# Altium PCB CORE_V2_封装(AD格式).PcbDoc
Units mil, origin at the board's own origin, x right, y up, seen from the top; angles counter-clockwise.
Board outline 2165.4 x 2165.4 mil, 4 copper layers (Signal, Plane, Signal #001, Signal #002), stack 28.8 mil thick; 9 components, 0 nets, 187 pads, 0 vias.
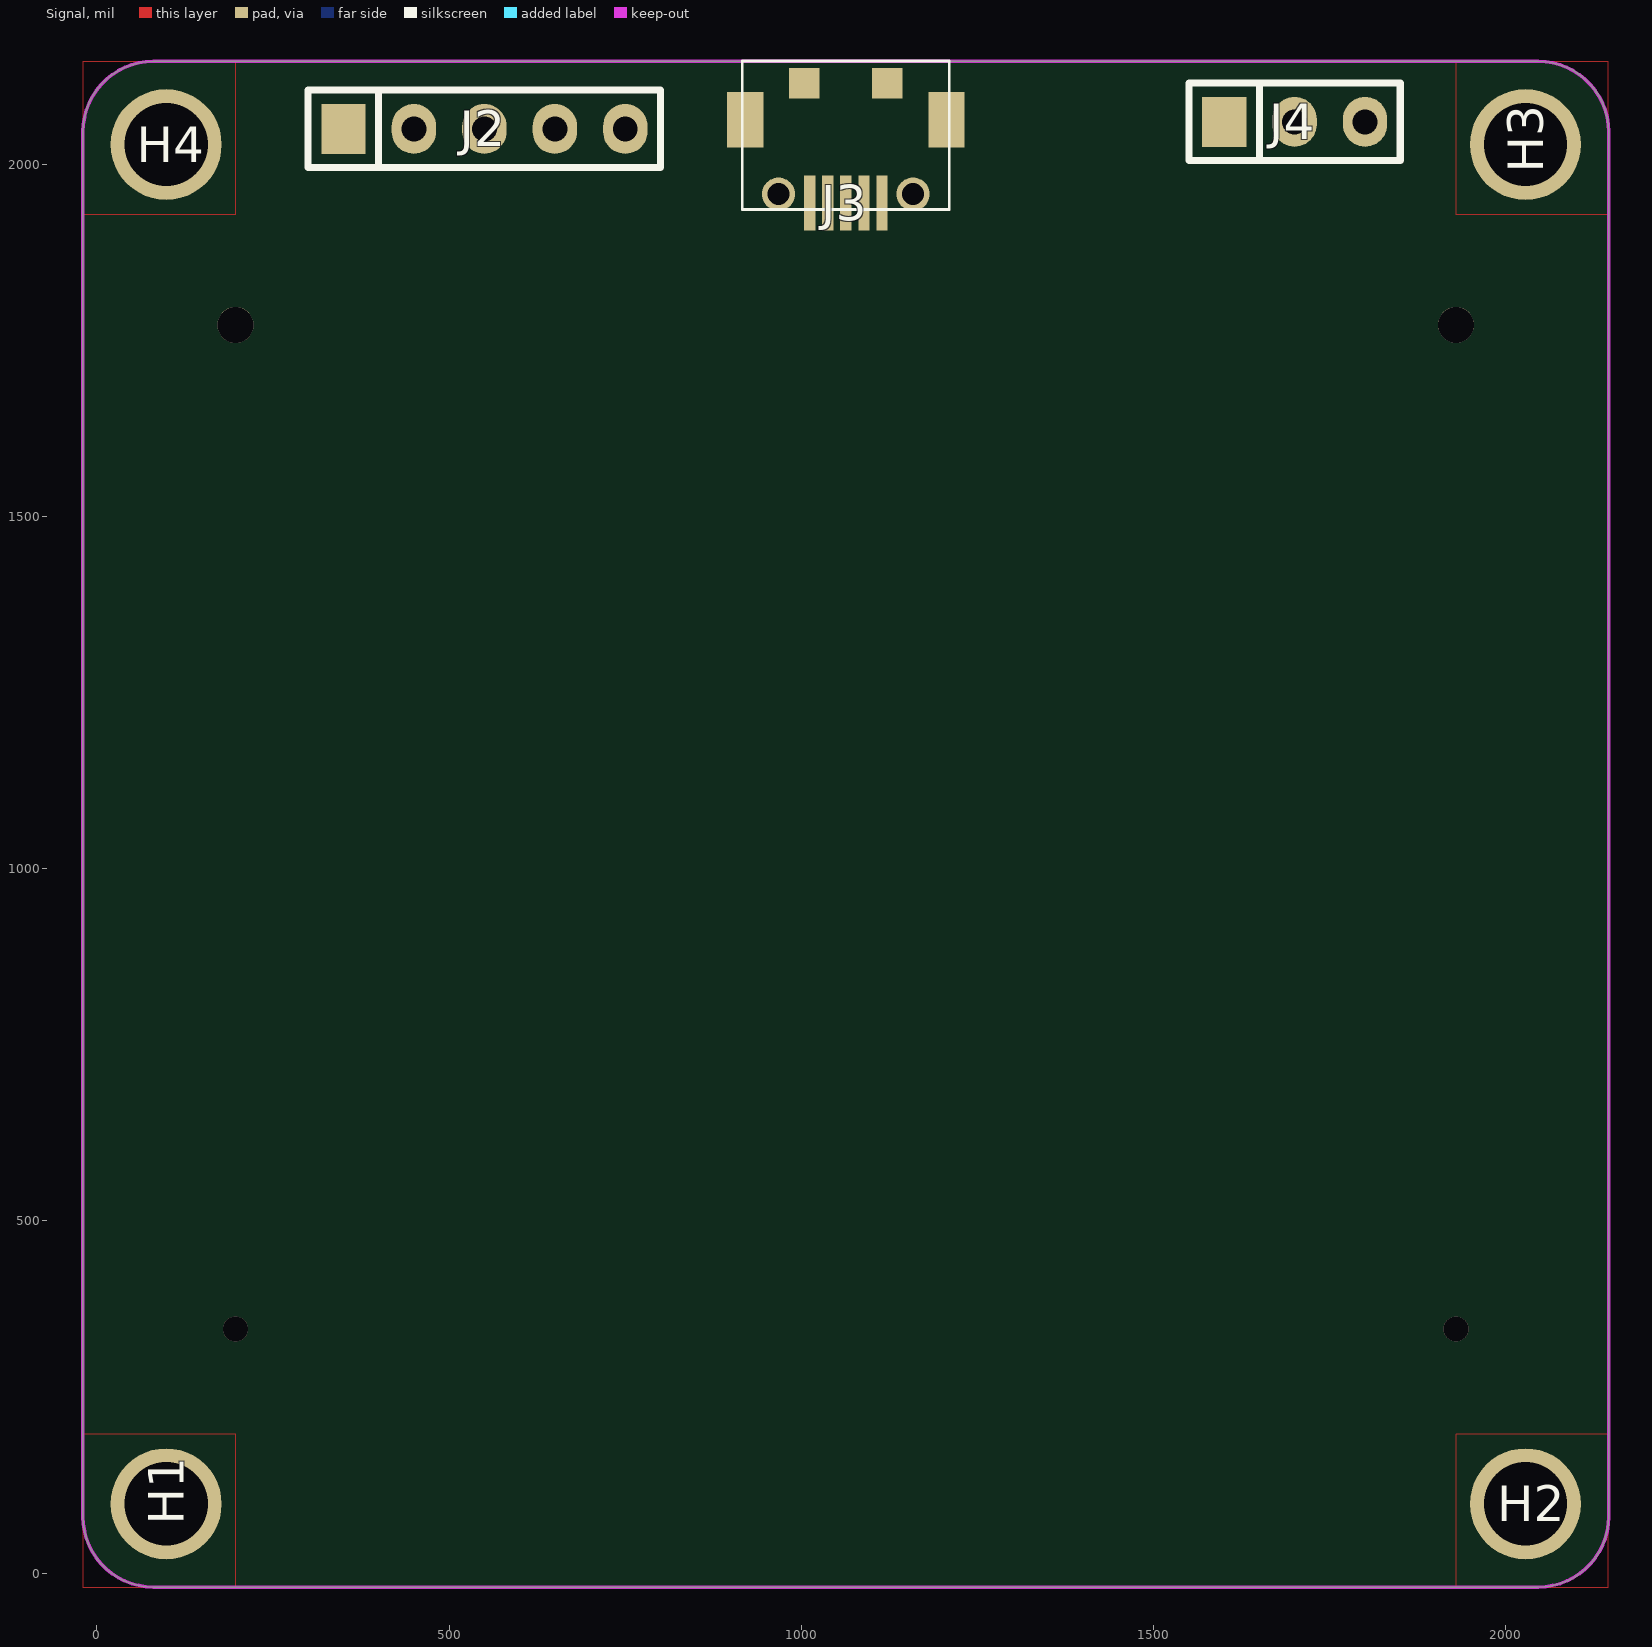
[diagram p0: Signal view]
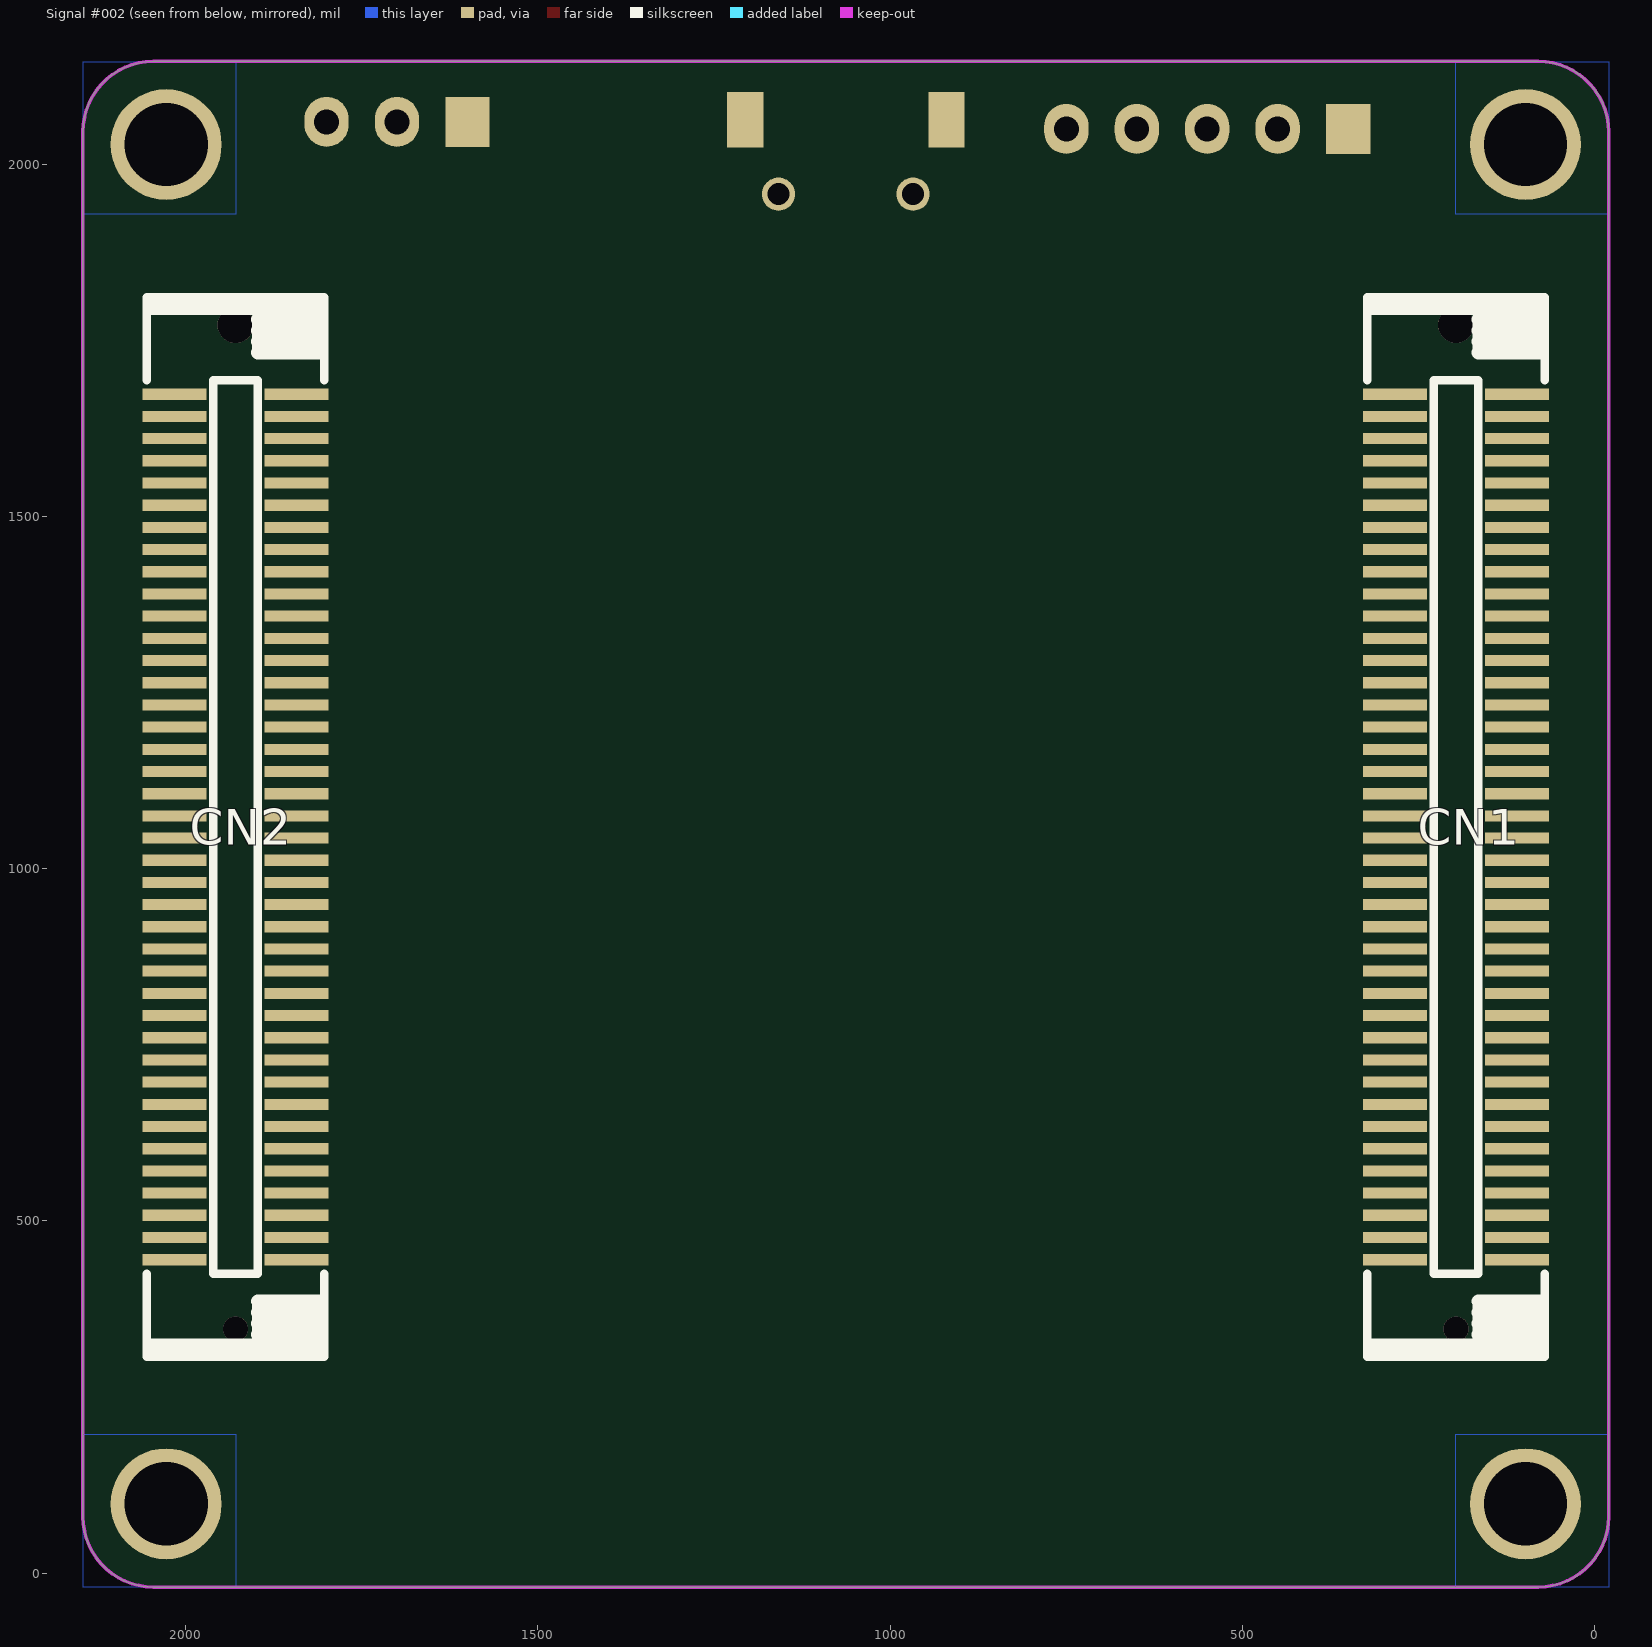
[diagram p1: Signal #002 view, seen from below]

## Layer stack, top to bottom
Solder Mask Top: solder mask 0.4, Solder Resist, Dk 3.5
Signal: signal copper 1.2
Dielectric 1: dielectric 8, FR-4, Dk 4.5
Plane: signal copper 1.2
Dielectric2: dielectric 8, FR-4, Dk 4.5
Signal #001: signal copper 1.2
Dielectric3: dielectric 8, FR-4, Dk 4.5
Signal #002: signal copper 1.2
Solder Mask Bottom: solder mask 0.4, Solder Resist, Dk 3.5

## Board outline
80,-19.7 2046,-19.7 ccw(c2046,80) 2145.7,80 2145.7,2046 ccw(c2046,2046) 2046,2145.7 80,2145.7 ccw(c80,2046) -19.7,2046 -19.7,80 ccw(c80,80)

## Design rules (kind name [scope] priority, off if disabled: settings)
Clearance "Clearance - Default - DEFAULT - Via" [IsVia vs IsVia] p1: gap=5 ignorepadtopadclearanceinfootprint=FALSE
Clearance "Clearance - Default - DEFAULT- SMD" [IsVia vs IsSMTPin] p2: gap=5 ignorepadtopadclearanceinfootprint=FALSE
Clearance "Clearance - Default - DEFAULT - Net" [All] p3: gap=5 ignorepadtopadclearanceinfootprint=FALSE except(0: Arc-Hole Track-Hole SMDPad-Hole THPad-Hole Via-Hole Fill-Hole Poly-Hole Region-Hole Text-Hole; 3.9: Via-Fill Via-Poly Via-Region; 5.2: Arc-Via Track-Via SMDPad-Via Via-Text; 6: Arc-THPad Track-THPad SMDPad-THPad THPad-Text; 10: Arc-Fill Arc-Poly Arc-Region Track-Fill Track-Poly Track-Region Text-Text)
ComponentClearance "ComponentClearance - Default -" [All] p1: gap=0 collisioncheckmode=3 verticalgap=10 showdistances=FALSE
ComponentClearance "ComponentClearance - Default - DEFAULT" [All] p2: gap=0 collisioncheckmode=3 verticalgap=10 showdistances=FALSE
FanoutControl Fanout_SOIC [IsSOIC] p1: bgadir=Out bgaviamode=Centered fanoutstyle=Auto fanoutdirection=Alternating viagrid=1 // Fanout_SOIC (Default Rule)
FanoutControl Fanout_Small [(CompPinCount < 5)] p2: bgadir=Out bgaviamode=Centered fanoutstyle=Auto fanoutdirection=OutThenIn viagrid=1 // Fanout_Small (Default Rule)
FanoutControl Fanout_BGA [IsBGA] p3: bgadir=Out bgaviamode=Centered fanoutstyle=Auto fanoutdirection=Alternating viagrid=1 // Fanout_BGA (Default Rule)
FanoutControl Fanout_LCC [IsLCC] p4: bgadir=Out bgaviamode=Centered fanoutstyle=Auto fanoutdirection=Alternating viagrid=1 // Fanout_LCC (Default Rule)
HoleToHoleClearance "HoleToHoleClearance - Default - DEFAULT" [All] p1: gap=0 allowstackedmicrovias=TRUE
Length "Default Length" [All] p1: maxlimit=50000 minlimit=0
MaxMinImpedance "Default Impedance" [All] p1: minimum=50.00 maximum=150.0
ParallelSegment "Default Parallel Segment Same Layer" [All] p1: limit=1000 gap=200
ParallelSegment "Default Parallel Segment Adjasent" [All] p2: limit=1000 gap=200
PlaneClearance "PlaneClearance - FootPrint 'MICRO_USB_5S'" [HasFootprint('MICRO_USB_5S')] p1: clearance=17.7 // PAD - Power Plane Clearance
PlaneClearance "PlaneClearance - FootPrint 'B2BF-2X40-0P8'" [HasFootprint('B2BF-2X40-0P8')] p2: clearance=9.85 // PAD - Power Plane Clearance
PlaneClearance "PlaneClearance - FootPrint 'SIP3-2P54'" [HasFootprint('SIP3-2P54')] p3: clearance=39.35 // PAD - Power Plane Clearance
PlaneClearance "PlaneClearance - FootPrint 'T3'" [HasFootprint('T3')] p4: clearance=39.35 // PAD - Power Plane Clearance
PlaneClearance "PlaneClearance - FootPrint 'SIP5-2P54'" [HasFootprint('SIP5-2P54')] p5: clearance=39.35 // PAD - Power Plane Clearance
PlaneConnect "Default PlaneConnect" [All] p1: planeconnectstyle=Relief reliefexpansion=20 reliefentries=4 reliefconductorwidth=15 reliefairgap=10
PolygonConnect "PolygonConnect - Default SMT" [IsSMTPin] p1: connectstyle=Relief reliefconductorwidth=10 reliefentries=4 polygonreliefangle="45 Angle" airgapwidth=10
PolygonConnect "PolygonConnect - Default Pad" [All] p2: connectstyle=Relief reliefconductorwidth=15 reliefentries=4 polygonreliefangle="45 Angle" airgapwidth=10
RoutingLayers "RoutingLayers - Default - DEFAULT" [All] p1: top layer_v5=TRUE mid layer 1_v5=TRUE mid layer 2_v5=TRUE bottom layer_v5=TRUE
RoutingPriority "RoutingPriority - Default - DEFAULT" [All] p1: routingpriority=3
RoutingTopology "Default Routing Topology" [All] p1: topology=Shortest
RoutingVias "RoutingVias - Default - DEFAULT" [All] p1: holewidth=37 width=55 viastyle="Through Hole" minholewidth=37 minwidth=55 maxholewidth=37 maxwidth=55
SMDToCorner "SMDToCorner - Default - DEFAULT" [All] p1: distance=50000
SolderMaskExpansion [All] p1: expansion=4
Width "Width - NetClass - DIFF90" [InNetClass('DIFF90')] p1: maxlimit=250 minlimit=5 preferedwidth=5
Width "Default Width" [All] p2: maxlimit=250 minlimit=5 preferedwidth=5
Width "Default Width_1" [All] p3: maxlimit=250 minlimit=6 preferedwidth=6
19 further rules are at their usual default settings.

## Components (designator, comment, footprint, x,y, rotation, side; value= is the part's Value field where it differs from the comment)
CN1 "B2BF-2X40-0P8" B2BF-2X40-0P8 196.8,1059.1 r180 bottom
CN2 "B2BF-2X40-0P8" B2BF-2X40-0P8 1929.1,1059.1 r180 bottom
H1 "T3" T3 98.4,98.4 r270 top
H2 "T3" T3 2027.6,98.4 r0 top
H3 "T3" T3 2027.6,2027.6 r90 top
H4 "T3" T3 98.4,2027.6 r180 top
J2 "SIP5-2P54" SIP5-2P54 550,2050 r0 top
J3 "MICRO_USB_5S" MICRO_USB_5S 1063,1944.7 r180 top
J4 "SIP3-2P54" SIP3-2P54 1700,2060 r0 top

## Footprints (in the part's own frame and the unit in brackets; to place one, negate y for a bottom-side part, rotate by r counter-clockwise, add the part's x,y. Pads: shape width x height; smd on the part's side, far side on the other; paste and mask are expansions set on the pad)
B2BF-2X40-0P8 [mm]
  rect 2.301x0.401 smd mask+0.05: 1(-2.2,15.601) 2(2.2,15.601) 3(-2.2,14.801) 4(2.2,14.801) 5(-2.2,14) 6(2.2,14) 7(-2.2,13.2) 8(2.2,13.2) 9(-2.2,12.4) 10(2.2,12.4) 11(-2.2,11.6) 12(2.2,11.6) 13(-2.2,10.8) 14(2.2,10.8) 15(-2.2,10) 16(2.2,10) 17(-2.2,9.2) 18(2.2,9.2) 19(-2.2,8.4) 20(2.2,8.4) 21(-2.2,7.6) 22(2.2,7.6) 23(-2.2,6.8) 24(2.2,6.8) 25(-2.2,5.999) 26(2.2,5.999) 27(-2.2,5.199) 28(2.2,5.199) 29(-2.2,4.399) 30(2.2,4.399) 31(-2.2,3.599) 32(2.2,3.599) 33(-2.2,2.799) 34(2.2,2.799) 35(-2.2,1.999) 36(2.2,1.999) 37(-2.2,1.199) 38(2.2,1.199) 39(-2.2,0.401) 40(2.2,0.401) 41(-2.2,-0.401) 42(2.2,-0.401) 43(-2.2,-1.199) 44(2.2,-1.199) 45(-2.2,-1.999) 46(2.2,-1.999) 47(-2.2,-2.799) 48(2.2,-2.799) 49(-2.2,-3.599) 50(2.2,-3.599) 51(-2.2,-4.399) 52(2.2,-4.399) 53(-2.2,-5.199) 54(2.2,-5.199) 55(-2.2,-5.999) 56(2.2,-5.999) 57(-2.2,-6.8) 58(2.2,-6.8) 59(-2.2,-7.6) 60(2.2,-7.6) 61(-2.2,-8.4) 62(2.2,-8.4) 63(-2.2,-9.2) 64(2.2,-9.2) 65(-2.2,-10) 66(2.2,-10) 67(-2.2,-10.8) 68(2.2,-10.8) 69(-2.2,-11.6) 70(2.2,-11.6) 71(-2.2,-12.4) 72(2.2,-12.4) 73(-2.2,-13.2) 74(2.2,-13.2) 75(-2.2,-14) 76(2.2,-14) 77(-2.2,-14.801) 78(2.2,-14.801) 79(-2.2,-15.601) 80(2.2,-15.601)
  round 1.3 hole 1.3 unplated mask+0.05: 81(0,18.1)
  round 0.899 hole 0.899 unplated mask+0.064: 82(0,-18.1)
  silkscreen extent -3.2,-19.1 3.2,19.1
MICRO_USB_5S [mil]
  rect 15.8x78.7 smd mask+2: 1(-51.2,0) 2(-25.6,0) 3(0,0) 4(25.6,0) 5(51.2,0)
  round 47.2 hole 31.5 mask+2: 6(-95.5,-12.6) 7(95.5,-12.6)
  rect 51.2x78.7 all layers, no hole mask+2: 8(-142.7,-118.1) 11(142.7,-118.1)
  rect 43.3x43.3 smd mask+1.95: 9(-59.1,-169.7) 10(59.1,-169.7)
  silkscreen extent -147,-202 147,9
SIP3-2P54 [mil]
  rect 63x70.9 all layers, no hole mask+1.95: 1(-100,0)
  oval 63x70.9 hole 35.4 mask+1.95: 2(0,0) 3(100,0)
  silkscreen extent -150,-55 150,55
SIP5-2P54 [mil]
  rect 63x70.9 all layers, no hole mask+1.95: 1(-200,0)
  oval 63x70.9 hole 35.4 mask+1.95: 2(-100,0) 3(0,0) 4(100,0) 5(200,0)
  silkscreen extent -250,-55 250,55
T3 [mil]
  round 157.5 hole 118.1 mask+1.95: 1(0,0)

## Nets (pads, with @x,y where several pads share a name; then routed paths per layer and width w, separated by ;. In a path a pad name is that pad's centre, name@x,y a point inside that pad or via, vN(x,y) a via of type N, cw(c..) or ccw(c..) an arc to the next point about the centre after c; other vN are vias at no path point)
pads on no net: CN1.1 CN1.2 CN1.3 CN1.4 CN1.5 CN1.6 CN1.7 CN1.8 CN1.9 CN1.10 CN1.11 CN1.12 CN1.13 CN1.14 CN1.15 CN1.16 CN1.17 CN1.18 CN1.19 CN1.20 CN1.21 CN1.22 CN1.23 CN1.24 CN1.25 CN1.26 CN1.27 CN1.28 CN1.29 CN1.30 CN1.31 CN1.32 CN1.33 CN1.34 CN1.35 CN1.36 CN1.37 CN1.38 CN1.39 CN1.40 CN1.41 CN1.42 CN1.43 CN1.44 CN1.45 CN1.46 CN1.47 CN1.48 CN1.49 CN1.50 CN1.51 CN1.52 CN1.53 CN1.54 CN1.55 CN1.56 CN1.57 CN1.58 CN1.59 CN1.60 CN1.61 CN1.62 CN1.63 CN1.64 CN1.65 CN1.66 CN1.67 CN1.68 CN1.69 CN1.70 CN1.71 CN1.72 CN1.73 CN1.74 CN1.75 CN1.76 CN1.77 CN1.78 CN1.79 CN1.80 CN1.81 CN1.82 CN2.1 CN2.2 CN2.3 CN2.4 CN2.5 CN2.6 CN2.7 CN2.8 CN2.9 CN2.10 CN2.11 CN2.12 CN2.13 CN2.14 CN2.15 CN2.16 CN2.17 CN2.18 CN2.19 CN2.20 CN2.21 CN2.22 CN2.23 CN2.24 CN2.25 CN2.26 CN2.27 CN2.28 CN2.29 CN2.30 CN2.31 CN2.32 CN2.33 CN2.34 CN2.35 CN2.36 CN2.37 CN2.38 CN2.39 CN2.40 CN2.41 CN2.42 CN2.43 CN2.44 CN2.45 CN2.46 CN2.47 CN2.48 CN2.49 CN2.50 CN2.51 CN2.52 CN2.53 CN2.54 CN2.55 CN2.56 CN2.57 CN2.58 CN2.59 CN2.60 CN2.61 CN2.62 CN2.63 CN2.64 CN2.65 CN2.66 CN2.67 CN2.68 CN2.69 CN2.70 CN2.71 CN2.72 CN2.73 CN2.74 CN2.75 CN2.76 CN2.77 CN2.78 CN2.79 CN2.80 CN2.81 CN2.82 H1.1 H2.1 H3.1 H4.1 J2.1 J2.2 J2.3 J2.4 J2.5 J3.1 J3.2 J3.3 J3.4 J3.5 J3.6 J3.7 J3.8 J3.9 J3.10 J3.11 J4.1 J4.2 J4.3

## Polygon pours and split planes (outlines as drawn)
no net on Signal #002 "Signal #002-No Net" (solid, remove dead copper, pour order 16): 1929.1,-20 2145,-20 2145,196.9 1929.1,196.9
no net on Signal #002 "Signal #002-No Net 1" (solid, remove dead copper, pour order 14): -20,-20 196.9,-20 196.9,196.9 -20,196.9
no net on Signal #002 "Signal #002-No Net 2" (solid, remove dead copper, pour order 10): 1929.1,1929.1 2145,1929.1 2145,2145 1929.1,2145
no net on Signal #002 "Signal #002-No Net 3" (solid, remove dead copper, pour order 2): -20,1929.1 196.9,1929.1 196.9,2145 -20,2145
no net on Signal "Signal-No Net" (solid, remove dead copper, pour order 12): -20,-20 196.9,-20 196.9,196.9 -20,196.9
no net on Signal "Signal-No Net 1" (solid, remove dead copper, pour order 8): 1929.1,-20 2145,-20 2145,196.9 1929.1,196.9
no net on Signal "Signal-No Net 2" (solid, remove dead copper, pour order 6): 1929.1,1929.1 2145,1929.1 2145,2145 1929.1,2145
no net on Signal "Signal-No Net 3" (solid, remove dead copper, pour order 4): -20,1929.1 196.9,1929.1 196.9,2145 -20,2145

## Keep-outs
Keep-Out Layer:
  the board outline again, w5